# Altium PCB PCB1.PcbDoc
Units mil, origin at the board's own origin, x right, y up, seen from the top; angles counter-clockwise.
Board outline 6000 x 4000 mil, 2 copper layers (Top Layer, Bottom Layer); 17 components, 9 nets, 41 pads, 0 vias.
Unrouted connection lines stored in the file: 32.
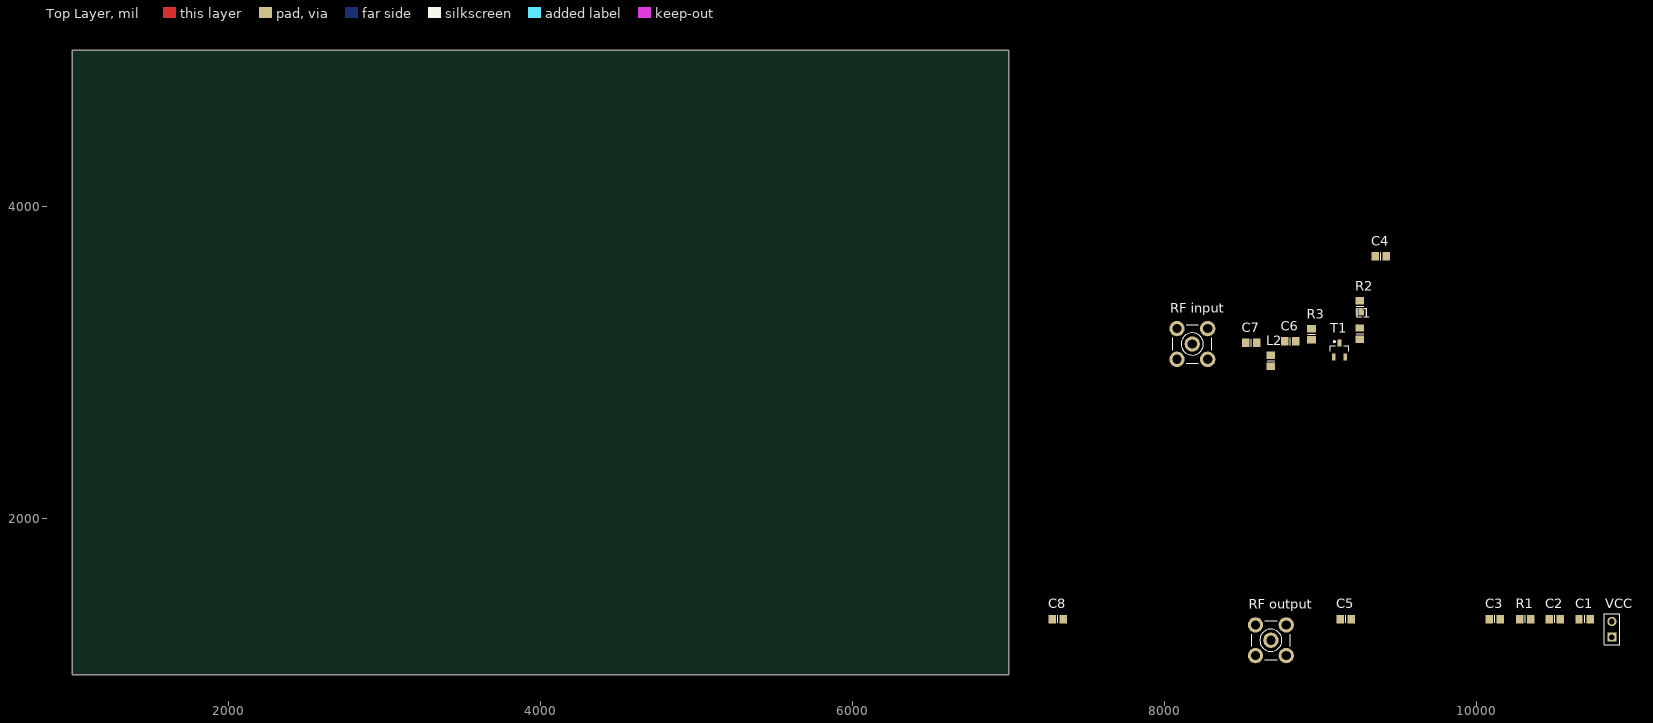
[diagram p0: Top Layer view]
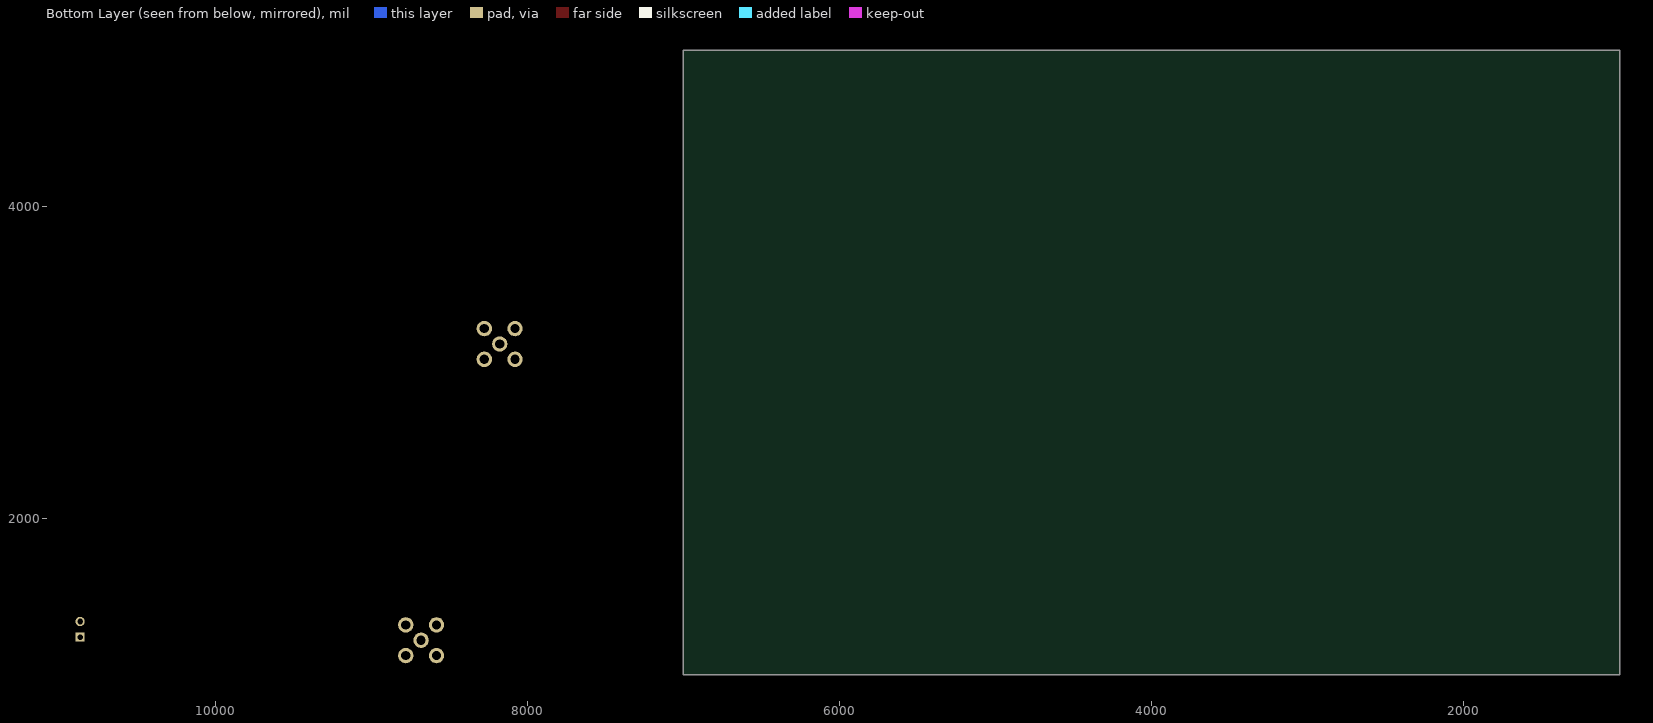
[diagram p1: Bottom Layer view, seen from below]

## Layer stack, top to bottom
Top Solder: solder mask 0.4, Solder Resist, Dk 3.5
Top Layer: signal copper 1.4
Dielectric 1: dielectric 12.6, FR-4, Dk 4.8
Bottom Layer: signal copper 1.4
Bottom Solder: solder mask 0.4, Solder Resist, Dk 3.5

## Board outline
1000,1000 7000,1000 7000,5000 1000,5000

## Design rules (kind name [scope] priority, off if disabled: settings)
Clearance [All] p1: gap=10 ignorepadtopadclearanceinfootprint=FALSE except(0: Arc-Hole Track-Hole SMDPad-Hole THPad-Hole Via-Hole Fill-Hole Poly-Hole Region-Hole Text-Hole)
PolygonConnect [All] p1: connectstyle=Relief reliefconductorwidth=10 reliefentries=4 polygonreliefangle="90 Angle" airgapwidth=10
RoomDefinition Sheet3 [InComponentClass('Sheet3')] p1: confinementstyle=ConfineIn formatcopy=TRUE lockcomponents=FALSE outline 7045,1060 11000,1060 11000,3680 7045,3680
RoutingVias [All] p1: holewidth=28 width=50 viastyle="Through Hole" minholewidth=28 minwidth=50 maxholewidth=28 maxwidth=50
SolderMaskExpansion [All] p1: expansion=4 istentingtop=FALSE
Width [All] p1: maxlimit=10 minlimit=10 preferedwidth=10
30 further rules are at their usual default settings.

## Components (designator, comment, footprint, x,y, rotation, side; value= is the part's Value field where it differs from the comment)
C1 "Cap Pol2" 6-0805_N 10690,1355 r0 top value=56nF
C2 "Cap Pol2" 6-0805_N 10500,1355 r0 top value=220pF
C3 "Cap Pol2" 6-0805_N 10115,1355 r0 top value=3.9nF
C4 "Cap Pol2" 6-0805_N 9385,3680 r0 top value=220pF
C5 "Cap Pol2" 6-0805_N 9160,1355 r0 top value=8.2pF
C6 "Cap Pol2" 6-0805_N 8805,3135 r0 top value=82pF
C7 "Cap Pol2" 6-0805_N 8555,3125 r0 top value=47pF
C8 "Cap Pol2" 6-0805_N 7315,1355 r0 top value=1.5pF
L1 "Inductor" 6-0805_N 9250,3185 r270 top value=8.2nH
L2 "Inductor" 6-0805_N 8680,3010 r270 top value=10nH
R1 "" 6-0805_N 10310,1355 r0 top value=22
R2 "0" 6-0805_N 9250,3360 r90 top value=10
R3 "0" 6-0805_N 8940,3180 r90 top value=10K
"RF input" "SMB" SMB_V-RJ45 8176.57,3118.43 r90 top
"RF output" "SMB" SMB_V-RJ45 8680,1220 r90 top
T1 "NPN" SOT23_N 9120,3080 r90 top
VCC "Header 2" HDR1X2 10865,1240 r90 top

## Footprints (in the part's own frame and the unit in brackets; to place one, negate y for a bottom-side part, rotate by r counter-clockwise, add the part's x,y. Pads: shape width x height; smd on the part's side, far side on the other; paste and mask are expansions set on the pad)
6-0805_N [mm]
  rect 1.2x1.4 smd: 1(-0.9,0) 2(0.9,0)
  silkscreen extent 0,-0.6 0,0.6, body extent -1.07,-0.7 1.07,0.7, height 0.7
HDR1X2 [mm]
  rect 1.5x1.5 hole 0.9: 1(0,0)
  round 1.5 hole 0.9: 2(2.54,0)
  silkscreen extent -1.27,-1.27 3.81,1.27
SMB_V-RJ45 [mm]
  round 2.5 hole 1.5: 1(0,0) 2(-2.5,-2.5) 2(-2.5,2.5) 2(2.5,-2.5) 2(2.5,2.5)
  silkscreen extent -3.15,-3.15 3.15,3.15
SOT23_N [mm]
  rect 1.15x0.6 smd: 1(1.125,0) 2(-1.125,-0.95) 3(-1.125,0.95)
  silkscreen extent -0.2,-1.5 1.47,1.5, body extent -0.7,-1.5 0.7,1.5, height 1.1

## Part data
C1 C2 C3 C4 C5 C6 C7 C8: library part "Cap Pol2_1", "Polarized Capacitor (Axial)", LatestRevisionDate=17-Jul-2002, LatestRevisionNote="Re-released for DXP Platform.", PackageDescription="Polarized Capacitor; 2 Leads", PackageReference=POLAR0.8, Published=8-Jun-2000, Publisher="Altium Limited"
R1 R2 R3: library part Res1, "Resistor", LatestRevisionDate=17-Jul-2002, LatestRevisionNote="Re-released for DXP Platform.", PackageDescription="Axial Device, Thru-Hole; 2 Leads; 0.3 in Pin Spacing", PackageReference=AXIAL-0.3, Published=8-Jun-2000, Publisher="Altium Limited"
"RF input" "RF output": "SMB Straight Connector", LatestRevisionDate=17-Jul-2002, LatestRevisionNote="Re-released for DXP Platform.", Publisher="Altium Limited"
T1: "NPN Bipolar Transistor", Code_JEDEC=TO-226-AA, LatestRevisionDate=17-Jul-2002, LatestRevisionNote="Re-released for DXP Platform.", PackageDescription="TO, Flat Index; 3 In-Line, Axial Leads; Body Dia. 4.8mm; Leads 0.55 x 0.51 mm (max)", PackageReference=TO-226-AA, Published=8-Jun-2000, Publisher="Altium Limited"
VCC: "Header, 2-Pin", LatestRevisionDate=17-Jul-2002, LatestRevisionNote="Re-released for DXP Platform.", Publisher="Altium Limited"
L1 L2: Code_IEC=1005, Code_JEITA=0402, LatestRevisionDate=29-May-2009, LatestRevisionNote="IPC-7351 Footprint Added.", PackageDescription="Chip Inductor", PackageReference=0402-A, Published=8-Jun-2000, Publisher="Altium Limited"

## Nets (pads, with @x,y where several pads share a name; then routed paths per layer and width w, separated by ;. In a path a pad name is that pad's centre, name@x,y a point inside that pad or via, vN(x,y) a via of type N, cw(c..) or ccw(c..) an arc to the next point about the centre after c; other vN are vias at no path point)
GND: "RF input.2" "RF output.2" C1.2 C2.2 C3.2 C4.2 C8.2 L2.2 T1.3 VCC.2
NetC1_1: C1.1 C2.1 R1.2 VCC.1
NetC3_1: C3.1 C4.1 R1.1 R2.2 R3.2
NetC5_1: C5.1 L1.2 T1.1
NetC5_2: "RF output.1" C5.2 C8.1
NetC6_1: C6.1 C7.2 L2.1
NetC6_2: C6.2 R3.1 T1.2
NetC7_1: "RF input.1" C7.1
NetL1_1: L1.1 R2.1